# Altium PCB lcd_reverse_engineering_rig.PcbDoc
Units mil, origin at the board's own origin, x right, y up, seen from the top; angles counter-clockwise.
Board outline 1127.56 x 1238.19 mil, 2 copper layers (Top Layer, Bottom Layer); 13 components, 61 nets, 124 pads, 12 vias.
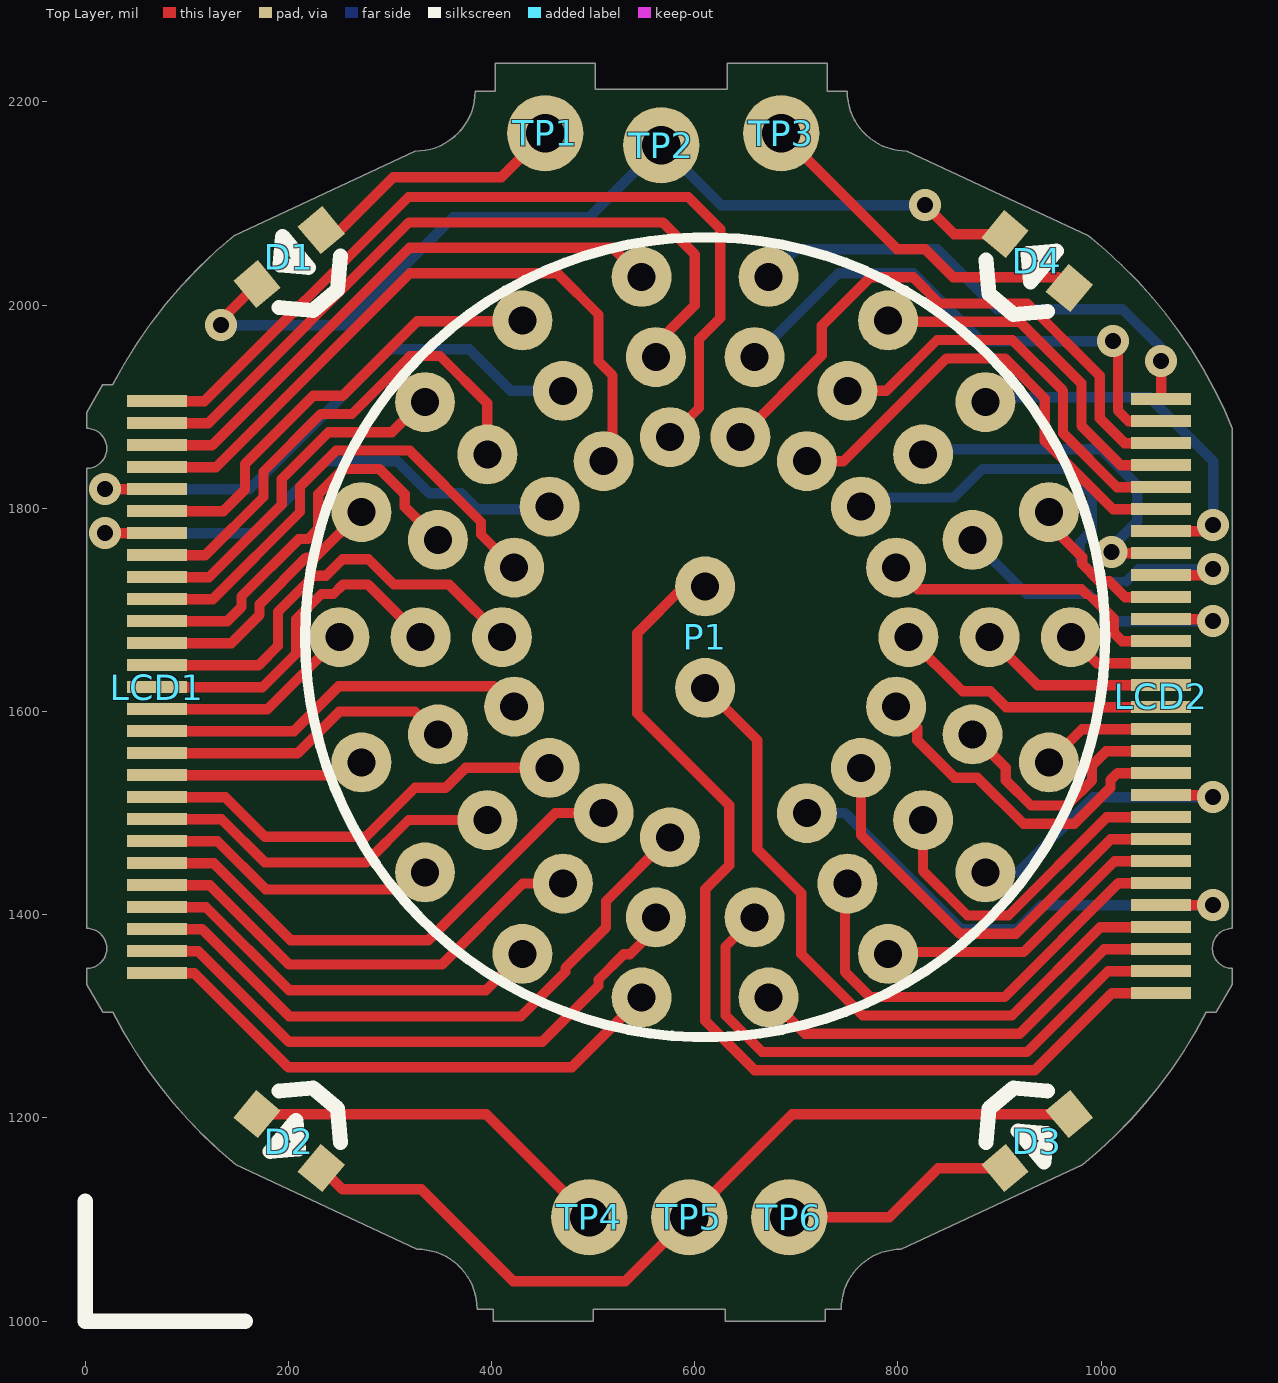
[diagram p0: Top Layer view]
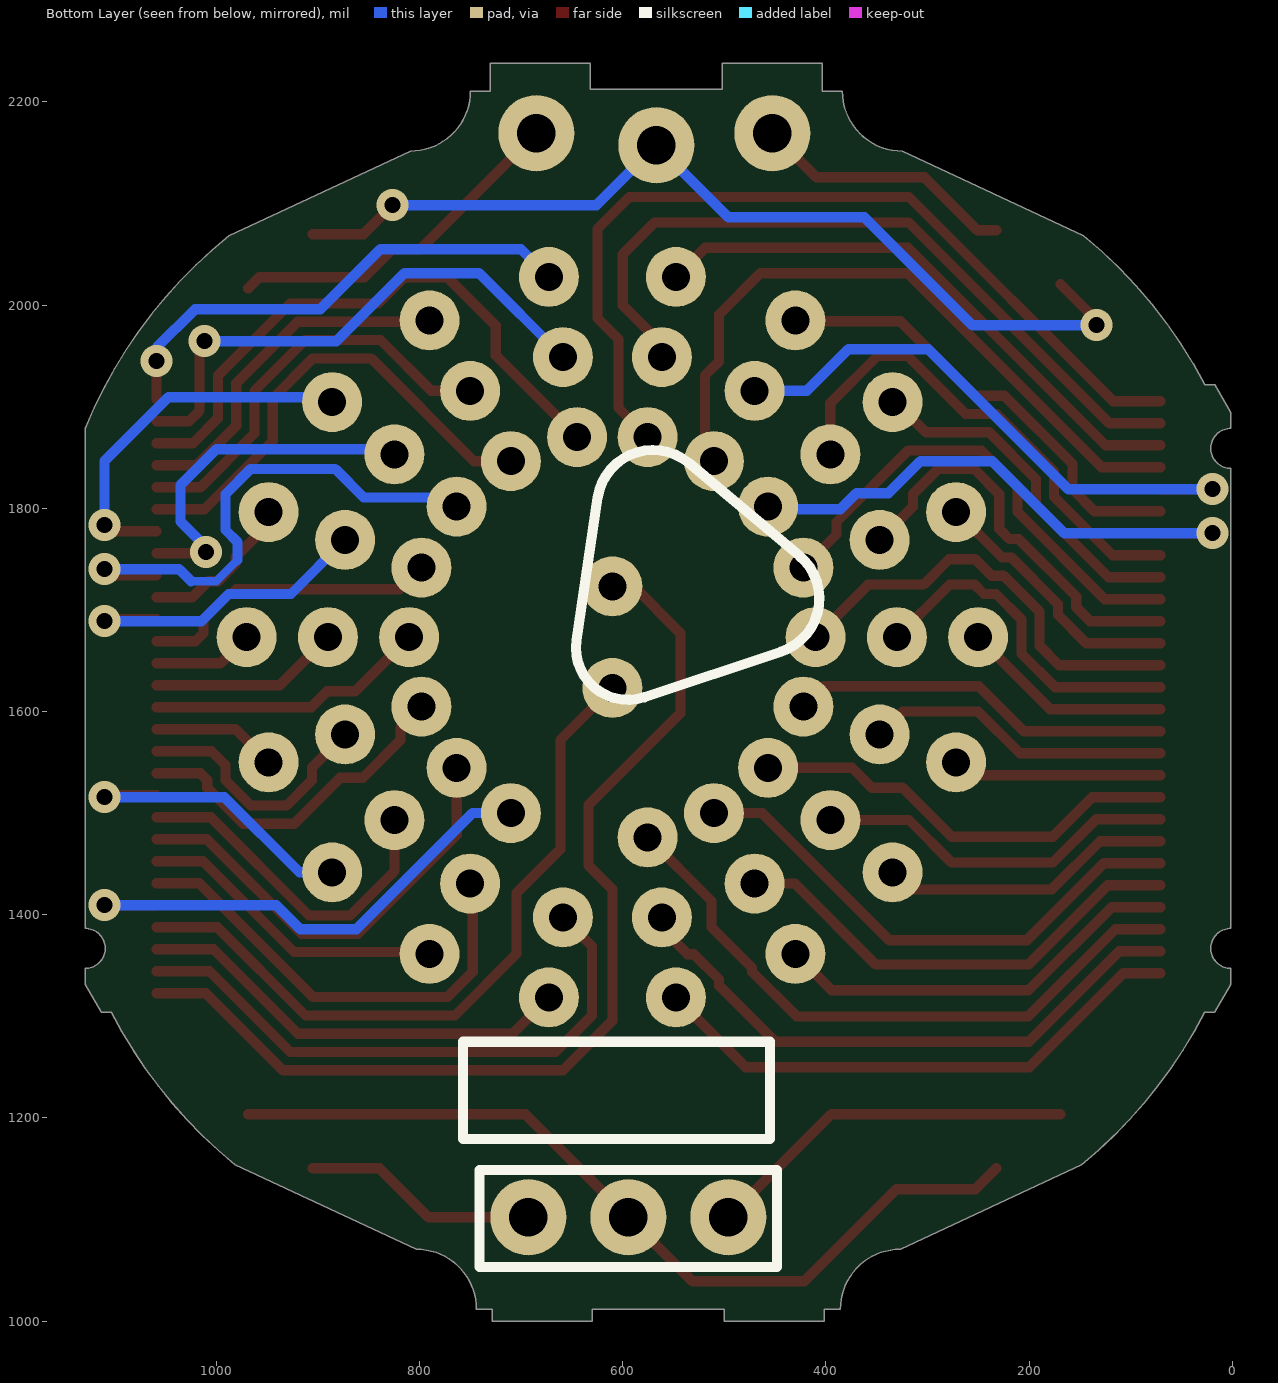
[diagram p1: Bottom Layer view, seen from below]

## Layer stack, top to bottom
Top Layer: signal copper 1.4
Dielectric: dielectric 12.6, FR-4, Dk 4.8
Bottom Layer: signal copper 1.4

## Board outline
17.32,1304.22 27.16,1304.22 ccw(c447.65,1519.61) 148.36,1154.06 326.77,1070.87 cw(c326.77,1011.81) 385.83,1011.81 401.57,1011.81 401.57,1000 500,1000 500,1011.81 629.92,1011.81 629.92,1000 728.35,1000 728.35,1011.81 744.09,1011.81 cw(c803.15,1011.81) 803.15,1070.87 981.56,1154.06 ccw(c683.63,1520.72) 1103.54,1304.22 1113.39,1304.22 1129.14,1331.5 1129.14,1347.24 cw(c1129.14,1366.93) 1129.14,1386.62 1129.14,1878.74 ccw(c691.88,1699.83) 987.46,2068.38 809.06,2151.58 cw(c809.06,2210.63) 750,2210.63 730.32,2210.63 730.32,2238.19 631.89,2238.19 631.89,2212.6 501.97,2212.6 501.97,2238.19 403.54,2238.19 403.54,2210.63 383.86,2210.63 cw(c324.8,2210.63) 324.8,2151.58 146.39,2068.38 146.39,2068.39 ccw(c445.92,1703.02) 27.16,1921.77 17.32,1921.77 1.57,1894.49 1.57,1878.74 cw(c1.57,1859.06) 1.57,1839.37 1.57,1386.62 cw(c1.57,1366.93) 1.57,1347.24 1.57,1331.5

## Design rules (kind name [scope] priority, off if disabled: settings)
Clearance [All] p1: gap=8
PolygonConnect [All] p1: connectstyle=Relief reliefconductorwidth=10 reliefentries=4 polygonreliefangle="90 Angle"
RoutingVias [All] p1: holewidth=28 width=50 viastyle="Through Hole" minholewidth=28 minwidth=50 maxholewidth=28 maxwidth=50
SilkscreenOverComponentPads [All] p1: minsilkscreentomaskgap=10
SolderMaskExpansion [All] p1: expansion=4
Width [All] p1: maxlimit=39.37 minlimit=8 preferedwidth=10
27 further rules are at their usual default settings.

## Components (designator, comment, footprint, x,y, rotation, side; value= is the part's Value field where it differs from the comment)
D1 "LED2" LED_0802_90deg 200.79,2047.24 r220 top
D2 "LED2" LED_0802_90deg 200.79,1177.17 r320 top
D3 "LED2" LED_0802_90deg 937.01,1177.17 r40 top
D4 "LED2" LED_0802_90deg 937.01,2043.31 r140 top
LCD1 "Zebra strip" LCD_Connector_27 70.87,1342.52 r0 top locked
LCD2 "Zebra strip" LCD_Connector_28 1059.06,1322.83 r0 top locked
P1 "55 wires soldered to PCB" Wires55 610.24,1673.23 r0 top locked
TP1 "TESTPOINT_THT_MINI" THP_D38_T75_B75#1 452.76,2169.29 r0 top
TP2 "TESTPOINT_THT_MINI" THP_D38_T75_B75#1 566.93,2157.48 r0 top
TP3 "TESTPOINT_THT_MINI" THP_D38_T75_B75#2 685.04,2165.35 r0 top
TP4 "TESTPOINT_THT_MINI" THP_D38_T75_B75#1 496.06,1102.36 r0 top
TP5 "TESTPOINT_THT_MINI" THP_D38_T75_B75#1 594.49,1102.36 r0 top
TP6 "TESTPOINT_THT_MINI" THP_D38_T75_B75#1 692.91,1102.36 r0 top

## Footprints (in the part's own frame and the unit in brackets; to place one, negate y for a bottom-side part, rotate by r counter-clockwise, add the part's x,y. Pads: shape width x height; smd on the part's side, far side on the other; paste and mask are expansions set on the pad)
LCD_Connector_27 [mm] "27-pin LCD zebra strip connector, 0.55mm pitch"
  rect 1.5x0.3 smd: 1(0,0) 2(0,0.55) 3(0,1.1) 4(0,1.65) 5(0,2.2) 6(0,2.75) 7(0,3.3) 8(0,3.85) 9(0,4.4) 10(0,4.95) 11(0,5.5) 12(0,6.05) 13(0,6.6) 14(0,7.15) 15(0,7.7) 16(0,8.25) 17(0,8.8) 18(0,9.35) 19(0,9.9) 20(0,10.45) 21(0,11) 22(0,11.55) 23(0,12.1) 24(0,12.65) 25(0,13.2) 26(0,13.75) 27(0,14.3)
LCD_Connector_28 [mm] "28-pin LCD zebra strip connector, 0.55mm pitch"
  rect 1.5x0.3 smd: 1(0,0) 2(0,0.55) 3(0,1.1) 4(0,1.65) 5(0,2.2) 6(0,2.75) 7(0,3.3) 8(0,3.85) 9(0,4.4) 10(0,4.95) 11(0,5.5) 12(0,6.05) 13(0,6.6) 14(0,7.15) 15(0,7.7) 16(0,8.25) 17(0,8.8) 18(0,9.35) 19(0,9.9) 20(0,10.45) 21(0,11) 22(0,11.55) 23(0,12.1) 24(0,12.65) 25(0,13.2) 26(0,13.75) 27(0,14.3) 28(0,14.85)
LED_0802_90deg [mm]
  rect 0.8x0.9 smd: 1(-1.05,0) 2(1.05,0)
  silkscreen extent -1,-0.5 1,1.4
THP_D38_T75_B75#1 [mil] "Thru-Hole Pad with 75mil top and 75mil bottom annular rings"
  round 75 hole 38: 1(0,0)
THP_D38_T75_B75#2 [mil] "Thru-Hole Pad with 75mil top and 75mil bottom annular rings"
  round 75 hole 38: 1(0,3.94)
Wires55 [mm] "20mm diameter connection for 55 pins"
  round 1.5 hole 0.7: 1(-1.588,-9.005) 2(-1.235,-7.004) 3(-0.882,-5.003) 4(-4.572,-7.919) 5(-3.556,-6.159) 6(-2.54,-4.399) 7(-7.005,-5.878) 8(-5.448,-4.572) 9(-3.892,-3.265) 10(-8.593,-3.127) 11(-6.683,-2.432) 12(-4.774,-1.737) 13(-9.144,0) 14(-7.112,0) 15(-5.08,0) 16(-8.593,3.127) 17(-6.683,2.432) 18(-4.774,1.737) 19(-7.005,5.878) 20(-5.448,4.572) 21(-3.892,3.265) 22(-4.572,7.919) 23(-3.556,6.159) 24(-2.54,4.399) 25(-1.588,9.005) 26(-1.235,7.004) 27(-0.882,5.003) 28(1.588,9.005) 29(1.235,7.004) 30(0.882,5.003) 31(4.572,7.919) 32(3.556,6.159) 33(2.54,4.399) 34(7.005,5.878) 35(5.448,4.572) 36(3.892,3.265) 37(8.593,3.127) 38(6.683,2.432) 39(4.774,1.737) 40(9.144,0) 41(7.112,0) 42(5.08,0) 43(8.593,-3.127) 44(6.683,-2.432) 45(4.774,-1.737) 46(7.005,-5.878) 47(5.448,-4.572) 48(3.892,-3.265) 49(4.572,-7.919) 50(3.556,-6.159) 51(2.54,-4.399) 52(0,-1.27) 53(1.588,-9.005) 54(1.235,-7.004) 55(0,1.27)
  silkscreen extent -10,-10 10,10

## Part data
D1 D2 D3 D4: "Typical RED, GREEN, YELLOW, AMBER GaAs LED"
LCD1: library part "Zebra strip 27 pin", "Zebra strip connector to LCD module (27 pins)"
LCD2: library part "Zebra strip 28 pin", "Zebra strip connector to LCD module (28 pins)"
P1: library part Wires55
TP1 TP2 TP3 TP4 TP5 TP6: "Test Point PCB mount Miniature White"

## Via types
v1: diameter 31.5, hole 15.75, Top Layer to Bottom Layer, tented both sides, 12 vias

## Nets (pads, with @x,y where several pads share a name; then routed paths per layer and width w, separated by ;. In a path a pad name is that pad's centre, name@x,y a point inside that pad or via, vN(x,y) a via of type N, cw(c..) or ccw(c..) an arc to the next point about the centre after c; other vN are vias at no path point)
NetD1_1: D1.1 TP1.1 | length 259.8
  Top Layer w10: D1.1 250.98,2073.82 303.15,2125.98 409.45,2125.98 TP1.1
NetD1_2: D1.2 D4.2 TP2.1 | length 936.1
  Top Layer w10: v1(133.86,1980.32) 133.86,1985.41 D1.2 ; v1(826.77,2098.43) 855.32,2069.88 D4.2
  Bottom Layer w10: v1(133.86,1980.32) 255.91,1980.32 362.2,2086.61 496.06,2086.61 TP2.1 625.98,2098.43 v1(826.77,2098.43)
NetD2_1: D2.1 TP4.1 | length 368.9
  Top Layer w10: D2.1 394.69,1203.74 TP4.1
NetD2_2: D2.2 D3.2 TP5.1 | length 850.4
  Top Layer w10: D2.2 253.13,1129.92 330.71,1129.92 421.26,1039.37 531.5,1039.37 TP5.1 695.86,1203.74 D3.2
NetD3_1: D3.1 TP6.1 | length 232.4
  Top Layer w10: TP6.1 791.34,1102.36 839.57,1150.59 D3.1
NetD4_1: D4.1 TP3.1 | length 346.8
  Top Layer w10: TP3.1 799.21,2055.12 826.77,2055.12 854.33,2027.56 957.85,2027.56 D4.1
NetLCD1_1: LCD1.1 P1.1 | length 543.6
  Top Layer w10: LCD1.1 107.48,1342.52 200,1250 479.03,1250 P1.1
NetLCD1_2: LCD1.2 P1.2 | length 588.4
  Top Layer w10: LCD1.2 111.28,1364.17 200.46,1275 450,1275 505.2,1330.2 505.2,1336.31 530.11,1361.23 536.23,1361.23 561.61,1386.61 P1.2
NetLCD1_3: LCD1.3 P1.3 | length 630.6
  Top Layer w10: LCD1.3 115.08,1385.83 200.91,1300 428.92,1300 472.76,1343.84 472.76,1347.76 512.76,1387.76 512.76,1413.52 P1.3
NetLCD1_4: LCD1.4 P1.4 | length 408.1
  Top Layer w10: LCD1.4 118.89,1407.48 200.68,1325.68 394.46,1325.68 P1.4
NetLCD1_5: LCD1.5 P1.5 | length 464.8
  Top Layer w10: LCD1.5 122.69,1429.13 200.91,1350.91 350.91,1350.91 430.74,1430.74 P1.5
NetLCD1_6: LCD1.6 P1.6 | length 522.5
  Top Layer w10: LCD1.6 126.49,1450.79 202.28,1375 337.64,1375 462.66,1500.02 P1.6
NetLCD1_7: LCD1.7 P1.7 | length 290.2
  Top Layer w10: LCD1.7 130.29,1472.44 177.73,1425 317.64,1425 P1.7
NetLCD1_8: LCD1.8 P1.8 | length 359.7
  Top Layer w10: LCD1.8 134.1,1494.09 176.6,1451.6 276.6,1451.6 318.25,1493.25 P1.8
NetLCD1_9: LCD1.9 P1.9 | length 430.4
  Top Layer w10: LCD1.9 137.9,1515.75 176.82,1476.82 276.37,1476.82 324.54,1525 354.8,1525 374.47,1544.67 P1.9
NetLCD1_10: LCD1.10 P1.10 | length 206.3
  Top Layer w10: LCD1.10 259.25,1537.4 P1.10
NetLCD1_11: LCD1.11 P1.11 | length 302.6
  Top Layer w10: LCD1.11 209.06,1559.06 250,1600 324.59,1600 P1.11
NetLCD1_12: LCD1.12 P1.12 | length 378.1
  Top Layer w10: LCD1.12 205.25,1580.71 249.54,1625 402.12,1625 P1.12
NetLCD1_13: LCD1.13 P1.13 | length 208.7
  Top Layer w10: LCD1.13 179.37,1602.36 P1.13
NetLCD1_14: LCD1.14 P1.14 | length 342.3
  Top Layer w10: LCD1.14 174.47,1624.02 207.71,1657.25 207.71,1690.84 232.62,1715.76 244.4,1715.76 253.65,1725 278.46,1725 P1.14
NetLCD1_15: LCD1.15 P1.15 | length 434.1
  Top Layer w10: LCD1.15 170.67,1645.67 189.71,1664.71 189.71,1698.3 225.16,1733.76 236.95,1733.76 253.19,1750 278.92,1750 303.92,1725 358.46,1725 P1.15
NetLCD1_16: LCD1.16 P1.16 | length 260.6
  Top Layer w10: LCD1.16 143.69,1667.32 171.71,1695.34 171.71,1705.76 217.71,1751.76 226.76,1751.76 271.36,1796.36 P1.16
NetLCD1_17: LCD1.17 P1.17 | length 400.6
  Top Layer w10: LCD1.17 139.89,1688.98 153.71,1702.8 153.71,1713.21 210.25,1769.76 219.3,1769.76 229.42,1779.88 229.42,1813.97 254.33,1838.88 289.56,1838.88 314.47,1813.97 314.47,1801.64 P1.17
NetLCD1_18: LCD1.18 P1.18 | length 481.6
  Top Layer w10: LCD1.18 125.67,1710.63 211.42,1796.38 211.42,1821.43 246.88,1856.88 319.38,1856.88 389.65,1786.61 389.65,1774.28 P1.18
NetLCD1_19: LCD1.19 P1.19 | length 349.7
  Top Layer w10: LCD1.19 121.87,1732.28 193.42,1803.83 193.42,1828.88 239.42,1874.88 301.71,1874.88 331.45,1904.63 P1.19
NetLCD1_20: LCD1.20 P1.20 | length 490.3
  Top Layer w10: LCD1.20 118.07,1753.94 175.42,1811.29 175.42,1836.34 231.96,1892.88 262.57,1892.88 319.69,1950 349.24,1950 395.74,1903.49 P1.20
NetLCD1_21: LCD1.21 P1.21 | length 538.5
  Top Layer w10: v1(19.68,1775.59) LCD1.21
  Bottom Layer w10: v1(19.68,1775.59) 165.35,1775.59 236.22,1846.46 307.09,1846.46 338.58,1814.96 370.08,1814.96 385.83,1799.21 454.45,1799.21 P1.21
NetLCD1_22: LCD1.22 P1.22 | length 451.8
  Top Layer w10: LCD1.22 135.83,1797.24 157.42,1818.84 157.42,1843.79 224.51,1910.88 253.4,1910.88 326.77,1984.25 414.26,1984.25 415,1985 P1.22
NetLCD1_23: LCD1.23 P1.23 | length 582.5
  Top Layer w10: v1(19.68,1818.9) LCD1.23 ; P1.23 P1.23@475,1920.48
  Bottom Layer w10: v1(19.68,1818.9) 161.42,1818.9 299.21,1956.69 377.95,1956.69 418.93,1915.72 P1.23
NetLCD1_24: LCD1.24 P1.24 | length 684.1
  Top Layer w10: LCD1.24 128.72,1840.55 319.67,2031.5 464.57,2031.5 505.2,1990.87 505.2,1944.8 519.09,1930.91 519.09,1855.28 P1.24
NetLCD1_25: LCD1.25 P1.25 | length 569.2
  Top Layer w10: LCD1.25 124.92,1862.2 319.21,2056.5 518.99,2056.5 P1.25
NetLCD1_26: LCD1.26 P1.26 | length 744.8
  Top Layer w10: LCD1.26 121.12,1883.86 318.75,2081.5 568.5,2081.5 600,2050 600,2000 P1.26@550,1950
NetLCD1_27: LCD1.27 P1.27 | length 875.7
  Top Layer w10: LCD1.27 117.31,1905.51 318.3,2106.5 593.5,2106.5 625,2075 625,1987.45 604.14,1966.59 604.14,1898.83 P1.27
NetLCD2_1: LCD2.1 P1.55 | length 1015.3
  Top Layer w10: P1.55 589.37,1723.23 543.31,1677.17 543.31,1598.43 633.86,1507.87 633.86,1448.82 610.24,1425.2 610.24,1295.61 658.92,1246.93 934.6,1246.93 1010.5,1322.83 LCD2.1
NetLCD2_2: LCD2.2 P1.54 | length 585
  Top Layer w10: P1.54 630.22,1368.85 630.22,1301.08 666.37,1264.93 927.15,1264.93 1006.7,1344.49 LCD2.2
NetLCD2_3: LCD2.3 P1.53 | length 435.6
  Top Layer w10: P1.53 708.52,1282.93 919.69,1282.93 1002.9,1366.14 LCD2.3
NetLCD2_4: LCD2.4 P1.52 | length 716.3
  Top Layer w10: P1.52 661.42,1572.05 661.42,1464.57 704.72,1421.26 704.72,1361.37 765.16,1300.93 912.23,1300.93 999.1,1387.8 LCD2.4
NetLCD2_5: LCD2.5 P1.51 | length 508.3
  Top Layer w10: LCD2.5 v1(1110.24,1409.45)
  Bottom Layer w10: P1.51 748.01,1500.02 862.2,1385.83 917.32,1385.83 940.94,1409.45 v1(1110.24,1409.45)
NetLCD2_6: LCD2.6 P1.50 | length 456.1
  Top Layer w10: P1.50 747.71,1428.21 747.71,1343.84 772.62,1318.93 904.78,1318.93 1016.95,1431.1 LCD2.6
NetLCD2_7: LCD2.7 P1.49 | length 306.6
  Top Layer w10: P1.49 792.07,1363.3 923.69,1363.3 1013.15,1452.76 LCD2.7
NetLCD2_8: LCD2.8 P1.48 | length 440.4
  Top Layer w10: P1.48 763.45,1478.79 860.94,1381.3 916.23,1381.3 1009.34,1474.41 LCD2.8
NetLCD2_9: LCD2.9 P1.47 | length 342.8
  Top Layer w10: P1.47 824.73,1442.97 868.4,1399.3 908.78,1399.3 1005.54,1496.06 LCD2.9
NetLCD2_10: LCD2.10 P1.46 | length 306.8
  Top Layer w10: LCD2.10 1108.27,1517.72 v1(1110.24,1515.75)
  Bottom Layer w10: P1.46 918.2,1441.82 992.13,1515.75 v1(1110.24,1515.75)
NetLCD2_11: LCD2.11 P1.45 | length 340.8
  Top Layer w10: P1.45 818.9,1584.1 818.9,1571.77 855.73,1534.94 878.09,1534.94 923.45,1489.57 973.6,1489.57 1009.05,1525.03 1009.05,1532.49 1015.94,1539.37 LCD2.11
NetLCD2_12: LCD2.12 P1.44 | length 252.7
  Top Layer w10: P1.44 906,1544.81 906,1532.49 930.91,1507.57 966.14,1507.57 991.05,1532.49 991.05,1547.24 1004.83,1561.02 LCD2.12
NetLCD2_13: LCD2.13 P1.43 | length 124
  Top Layer w10: P1.43 981.1,1582.68 LCD2.13
NetLCD2_14: LCD2.14 P1.42 | length 277.4
  Top Layer w10: P1.42 863.47,1619.99 890.97,1619.99 906.63,1604.33 LCD2.14
NetLCD2_15: LCD2.15 P1.41 | length 188.4
  Top Layer w10: P1.41 937.48,1625.98 LCD2.15
NetLCD2_16: LCD2.16 P1.40 | length 99.4
  Top Layer w10: P1.40 995.83,1647.64 LCD2.16
NetLCD2_17: LCD2.17 P1.39 | length 298.9
  Top Layer w8: 985.29,1715.76 986.29,1714.76 987.44,1714.76 991.85,1710.35 993.26,1710.35
  Top Layer w10: P1.39 819.33,1720.47 980.57,1720.47 985.29,1715.76 ; 993.26,1710.35 1012.76,1690.84 1012.76,1677.17 1020.64,1669.29 LCD2.17
NetLCD2_18: LCD2.18 P1.38 | length 322
  Top Layer w10: LCD2.18 1108.27,1690.94 v1(1110.24,1688.98)
  Bottom Layer w10: P1.38 926.59,1715.76 987.85,1715.76 1014.63,1688.98 v1(1110.24,1688.98)
NetLCD2_19: LCD2.19 P1.37 | length 156
  Top Layer w10: P1.37 948.53,1784.76 981.32,1751.97 981.32,1745.19 998.16,1728.35 1007.87,1728.35 1023.62,1712.6 LCD2.19
NetLCD2_20: LCD2.20 P1.36 | length 521.3
  Top Layer w10: LCD2.20 1104.33,1734.25 v1(1110.24,1740.16)
  Bottom Layer w8: 979.13,1749.22 1000,1728.35 1024.91,1728.35
  Bottom Layer w10: P1.36 772.34,1810.68 854.89,1810.68 883.1,1838.88 966.14,1838.88 991.05,1813.97 991.05,1778.74 979.13,1766.81 979.13,1749.22 ; 1024.91,1728.35 1036.72,1740.16 v1(1110.24,1740.16)
NetLCD2_21: LCD2.21 P1.35 | length 386.1
  Top Layer w10: v1(1010.28,1757.31) 1007.87,1754.91 1004.93,1754.91 1004.48,1755.35 1007.87,1751.97 1011.81,1755.91 LCD2.21
  Bottom Layer w10: P1.35 829.79,1858.27 1000,1858.27 1035.43,1822.83 1035.43,1787.4 1007.87,1759.84 1007.87,1751.97 1004.49,1755.35 1004.93,1754.91 1007.87,1754.91 v1(1010.28,1757.31)
NetLCD2_22: LCD2.22 P1.34 | length 368.9
  Top Layer w10: LCD2.22 1104.33,1777.56 v1(1110.24,1783.46)
  Bottom Layer w10: P1.34 890.83,1909.45 1047.24,1909.45 1110.24,1846.46 v1(1110.24,1783.46)
NetLCD2_23: LCD2.23 P1.33 | length 476.8
  Top Layer w10: P1.33 746.43,1846.43 847.68,1947.68 905.08,1947.68 944.53,1908.24 944.53,1866.37 1011.68,1799.21 LCD2.23
NetLCD2_24: LCD2.24 P1.32 | length 414
  Top Layer w10: P1.32 788.48,1915.72 838.45,1965.68 912.54,1965.68 962.53,1915.69 962.53,1873.82 1015.48,1820.87 LCD2.24
NetLCD2_25: LCD2.25 P1.31 | length 383.4
  Top Layer w10: P1.31 793.24,1981.99 793.24,1993.24 800,2000 800,1983.68 919.99,1983.68 980.53,1923.15 980.53,1881.28 1019.29,1842.52 LCD2.25
NetLCD2_26: LCD2.26 P1.30 | length 588.8
  Top Layer w10: P1.30 644.97,1870.59 725,1950.62 725,1979.9 772.62,2027.53 814.99,2027.53 840.83,2001.68 927.45,2001.68 998.53,1930.61 998.53,1888.73 1023.09,1864.17 LCD2.26
NetLCD2_27: LCD2.27 P1.29 | length 532
  Top Layer w10: v1(1011.81,1964.57) 1016.53,1959.85 1016.53,1896.19 1026.89,1885.83 LCD2.27
  Bottom Layer w10: P1.29 741.38,2031.5 814.96,2031.5 881.89,1964.57 v1(1011.81,1964.57)
NetLCD2_28: LCD2.28 P1.28 | length 488.4
  Top Layer w10: LCD2.28 v1(1059.06,1944.88)
  Bottom Layer w10: P1.28 700.11,2055.12 838.58,2055.12 897.64,1996.06 1020.97,1996.06 1059.06,1957.98 v1(1059.06,1944.88)

## Silkscreen, mask and mechanical layers (free items; w line width, h text height)
Top Overlay:
  lines w15: 0,1118.11 0,1000 157.48,1000
Bottom Overlay:
  lines w10: 426.24,1753.5 ccw(c461.67,1711.27) 444.25,1658.98 578.72,1614.19 ccw(c594.9,1662.75) 645.53,1670.25 624.77,1810.45 ccw(c570.25,1802.38) 534.82,1844.6 426.24,1753.5 ; 448.24,1053.2 448.24,1148.87 741.15,1148.87 741.15,1053.2 448.24,1053.2 ; 455.14,1179.34 455.14,1275.01 757.11,1275.01 757.11,1179.34 455.14,1179.34
Mechanical 1:
  the board outline again, w10
Mechanical 2:
  lines w10: 40.94,1333.86 40.94,1918.51 100,1918.51 100,1333.86 40.94,1333.86 ; 148.85,1204.09 236.32,1130.7 251.5,1148.79 164.04,1222.18 148.85,1204.09 ; 148.85,2019.05 164.04,2000.95 251.5,2074.34 236.32,2092.44 148.85,2019.05 ; 884.97,1148.79 972.43,1222.18 987.61,1204.09 900.15,1130.7 884.97,1148.79 ; 884.97,2074.34 972.43,2000.95 987.61,2019.05 900.15,2092.44 884.97,2074.34 ; 1030.71,1313.78 1030.71,1920.08 1089.76,1920.08 1089.76,1313.78 1030.71,1313.78